# EAGLE board UV_MONITOR_V2_1 (EAGLE 8.4.0)
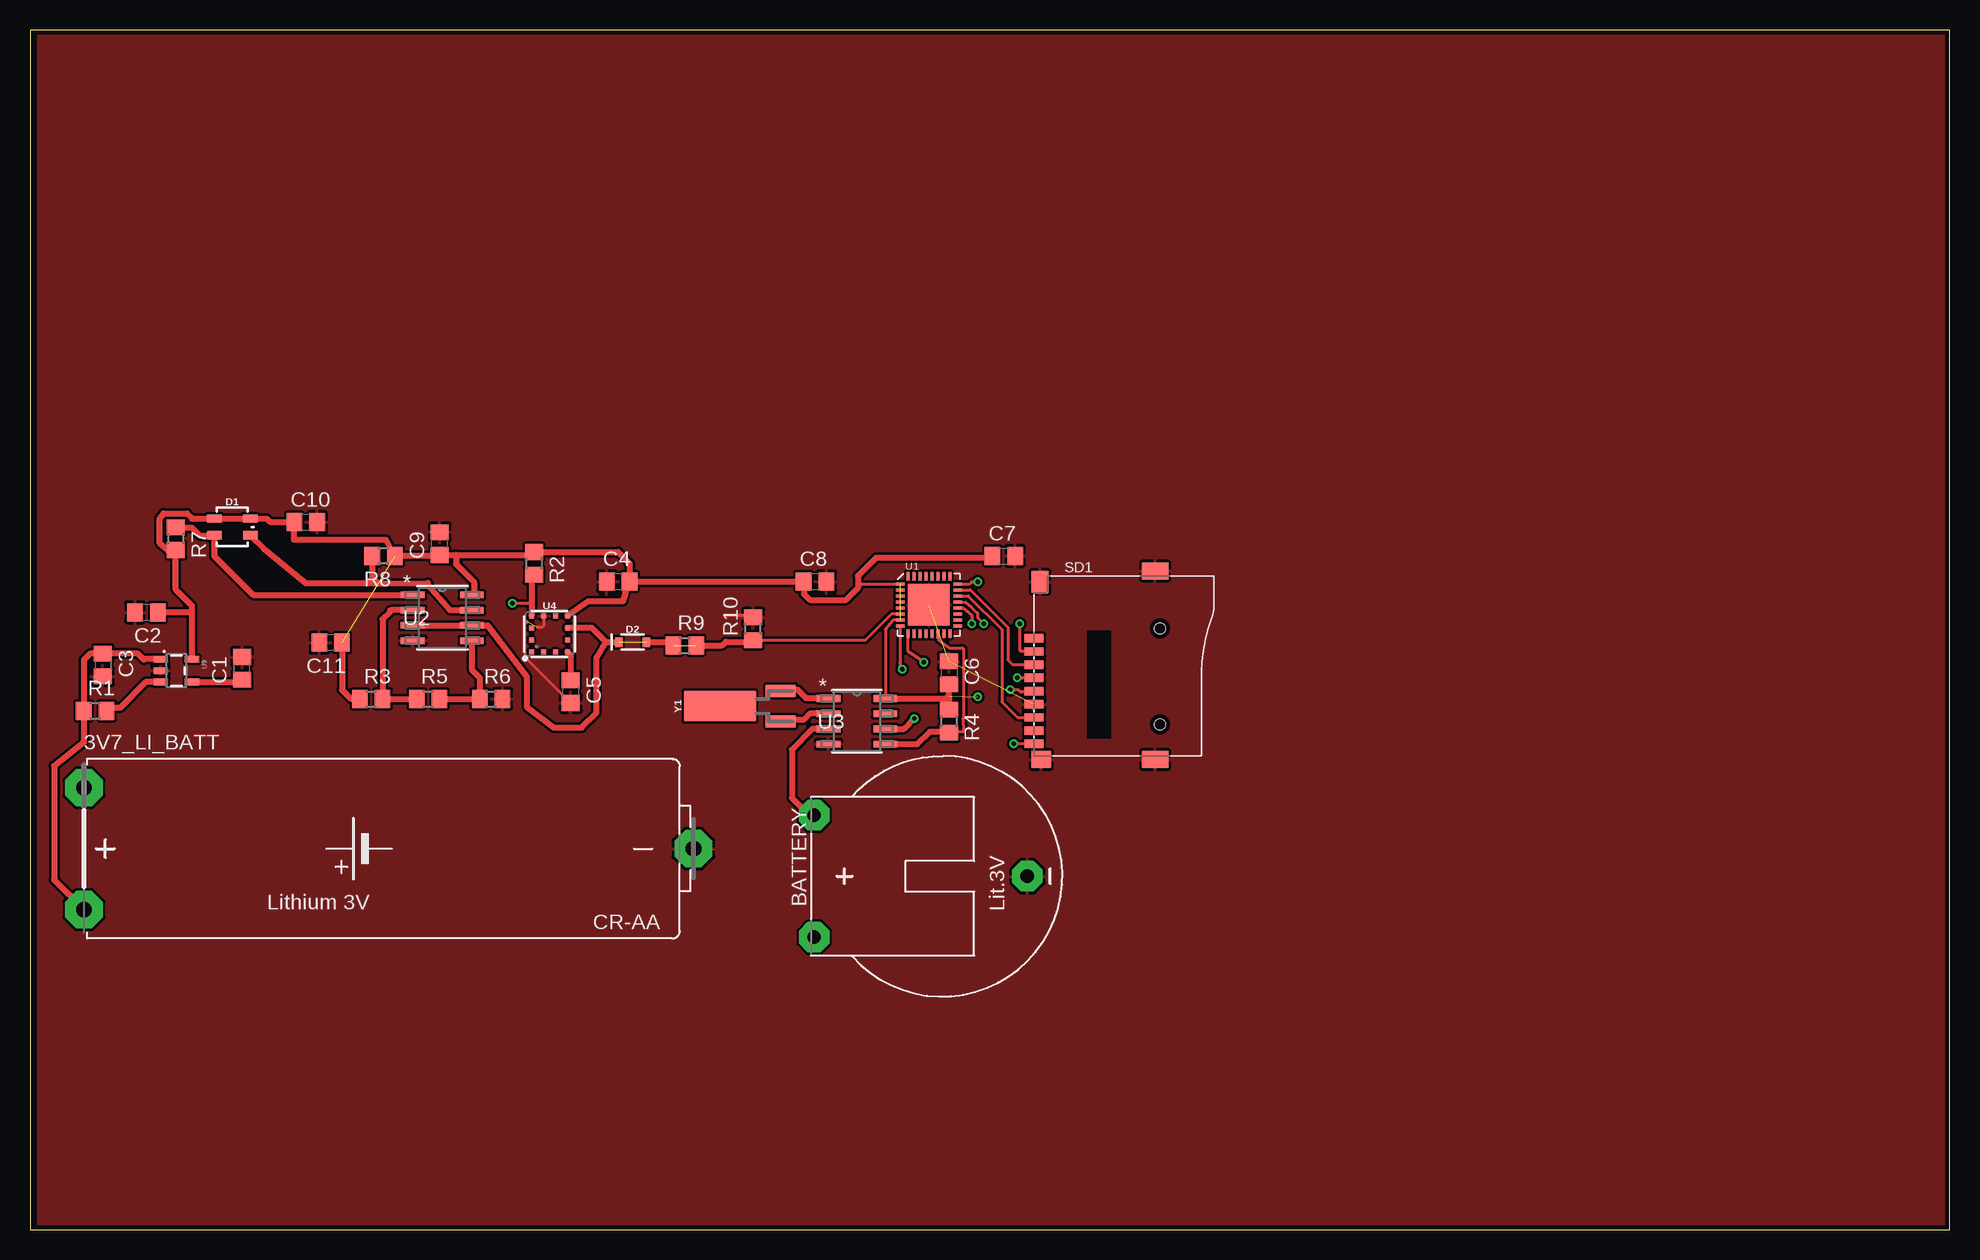
[diagram p0: board, top side]
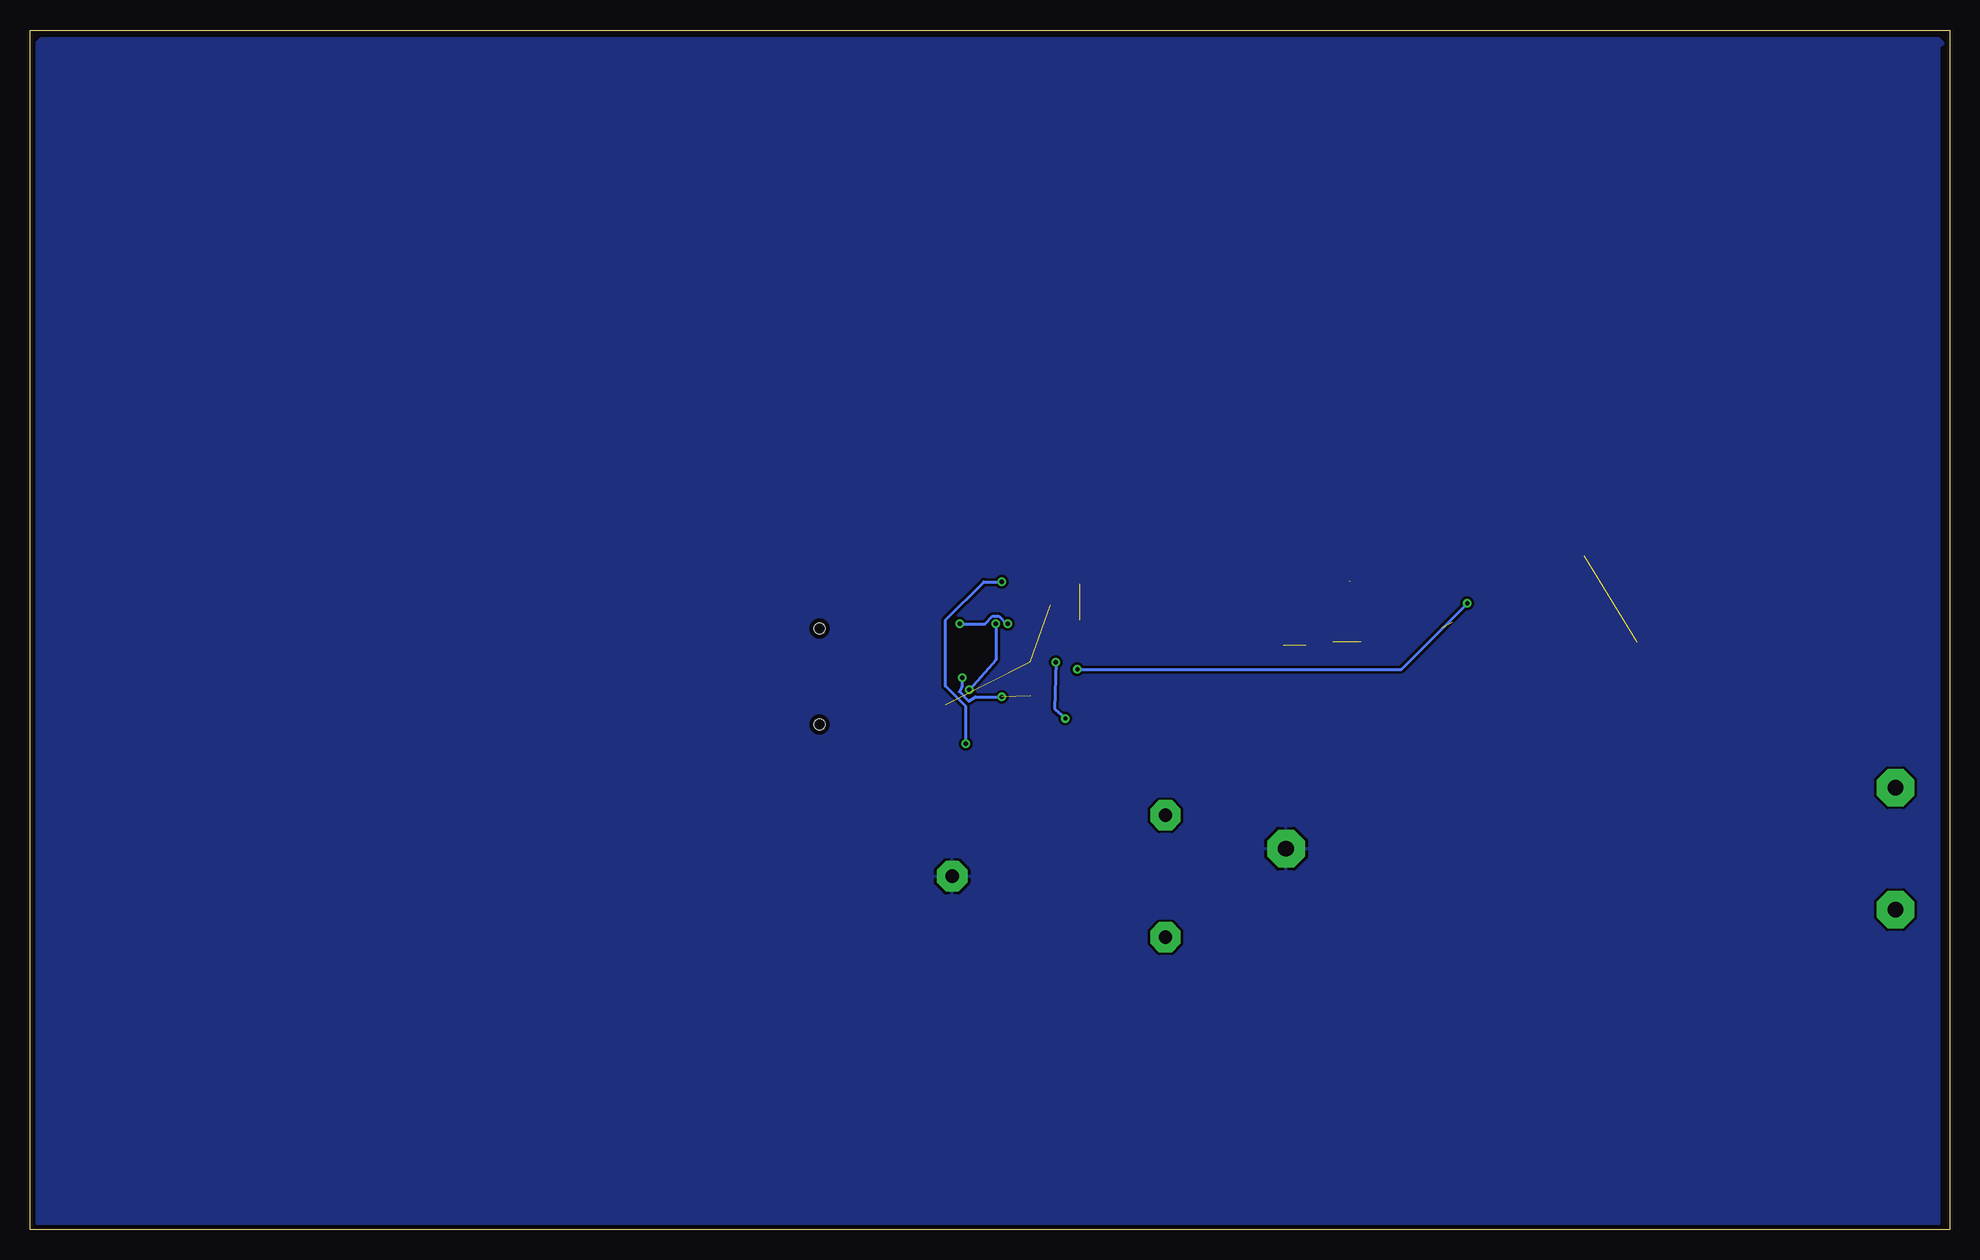
[diagram p1: board, bottom side, seen from below]

Size 160 x 100 mm. Coordinates in mm from the lower left corner, seen from the top.
Outline: 0,0 160,0 160,100 0,100 0,0
Copper layers (1*16): Top 0.0356mm / dielectric 1.5011mm / Bottom 0.0356mm
Design rules "osh-park-2-layers-design-rules": minimum track width 6mil, minimum drill 10mil, track to track 6mil, track to pad 6mil, pad to pad 6mil, via to via 6mil, smd to smd 6mil, copper to edge 15mil, drill to drill 6mil, minimum pad ring 7mil, minimum via ring 7mil, stop-mask expansion 3mil, vias tented up to drill 0mil, thermal gap 10mil
Net classes: 0 default: clearance 0.205 mm

## Footprints (pad centres in the part's own frame; a part is rotated, then mirrored left to right if it is on the bottom)
CRAA = drill 1.321 pad 3.15 octagon: + -25.4,-5.08; +@1 -25.4,5.08; - 25.4,0
CR2032H = drill 1.118 pad 2.54 octagon: + 5.08,10.795; +@1 -5.08,10.795; - 0,-6.985
C0805 = smd 1.3 x 1.5: 1 -0.95,0; 2 0.95,0
LED-TRICOLOR-SMD = smd 1.2 x 0.7: A 1.5,0.7; B -1.5,0.7; G -1.5,-0.7; R 1.5,-0.7
SOD-323 = smd 0.63 x 0.83: A 1.15,0; C -1.15,0
R0805 = smd 1.3 x 1.5: 1 -0.95,0; 2 0.95,0
MICRO-SD9+4P-SMD-16.1X14.5X1.85MM = smd 1.6 x 0.7: 1 0,2.25; 2 0,1.15; 3 0,0.05; 4 0,-1.05; 5 0,-2.15; 6 0,-3.25; 7 0,-4.35; 8 0,-5.45; 9 0,-6.55 | smd 1.6 x 1.4: G1 0.6,-7.85 | smd 2.2 x 1.4: G2 10.1,-7.85; G3 10.1,7.85 | smd 1.4 x 1.8: G4 0.5,6.95 | hole 0.9: 10.5,-4.95; 10.5,3.05
ESP8266EX = smd 0.7 x 0.25: CHIP_EN -2.4,-1.25; GPOIO5 2.4,1.75; LNA -2.4,1.25; SD_CLK 2.4,0.25; SD_CMD 2.4,-0.25; SD_DATA_0 2.4,0.75; SD_DATA_1 2.4,1.25; SD_DATA_2 2.4,-1.25; SD_DATA_3 2.4,-0.75; TOUT -2.4,-0.75; VDD3P3 -2.4,0.75; VDD3P3$2 -2.4,0.25; VDD_RTC -2.4,-0.25; VDDA -2.4,1.75; VDDPST$2 2.4,-1.75; XPD_DCDC -2.4,-1.75 | smd 0.25 x 0.7: EXT_RSTB -1.75,2.4; GPIO0 1.25,-2.4; GPIO2 0.75,-2.4; GPIO4 1.75,-2.4; MTCK -0.25,-2.4; MTDI -1.25,-2.4; MTDO 0.25,-2.4; MTMS -1.75,-2.4; RES12K -1.25,2.4; U0RXD 1.75,2.4; U0TXD 1.25,2.4; VDDA$2 -0.75,2.4; VDDD -0.25,2.4; VDDPST -0.75,-2.4; XTAL_IN 0.25,2.4; XTAL_OUT 0.75,2.4 | smd 3.45 x 3.45: GND 0,0
M08A = smd 1.981 x 0.559: 1 -2.464,1.905; 2 -2.464,0.635; 3 -2.464,-0.635; 4 -2.464,-1.905; 5 2.464,-1.905; 6 2.464,-0.635; 7 2.464,0.635; 8 2.464,1.905
SOIC8-N_MC = smd 1.981 x 0.559: 1 -2.362,1.905; 2 -2.362,0.635; 3 -2.362,-0.635; 4 -2.362,-1.905; 5 2.362,-1.905; 6 2.362,-0.635; 7 2.362,0.635; 8 2.362,1.905
ML8511 = smd 0.4 x 0.4: 1 -1.5,-1.5; 2 -1.5,-0.5; 3 -1.5,0.5; 4 -1.5,1.5; 5 -0.5,1.5; 6 0.5,1.5; 7 1.5,1.5; 8 1.5,0.5; 9 1.5,-0.5; 10 1.5,-1.5; 11 0.5,-1.5; 12 -0.5,-1.5
SOT23-5 = smd 0.55 x 1.2: 1 -0.95,-1.3; 2 0,-1.3; 3 0.95,-1.3; 4 0.95,1.3; 5 -0.95,1.3
CRYSTAL-SMD-2X6-CYL = smd 2.5 x 6: SHEILD 0,5.08 | smd 1 x 2.5: X1 -1.27,0; X2 1.27,0

## Placement (x,y rotation side)
3V7_LI_BATT  CR-AA  [CRAA]  29.9,31.75 0 top
BATTERY  CR2032H  [CR2032H]  76.15,29.45 90 top
C1  470p  [C0805]  17.67,46.78 90 top
C2  2.2n  [C0805]  9.7,51.45 180 top
C3  2.2n  [C0805]  6.08,47.06 270 top
C4  0.1u  [C0805]  49.03,54.03 0 top
C5  1n  [C0805]  45.07,44.85 270 top
C6  2.2n  [C0805]  76.59,46.41 270 top
C7  2.2n  [C0805]  81.17,56.15 0 top
C8  2.2n  [C0805]  65.43,54.03 0 top
C9  2.2n  [C0805]  34.15,57.18 90 top
C10  2.2n  [C0805]  22.99,58.97 0 top
C11  2.2n  [C0805]  25.06,48.92 180 top
D1  RGB_LED  [LED-TRICOLOR-SMD]  16.86,58.57 0 top
D2  1V  [SOD-323]  50.23,48.96 0 top
R1  10k  [R0805]  5.43,43.25 0 top
R2  10k  [R0805]  42,55.53 270 top
R3  80k  [R0805]  28.44,44.23 0 top
R4  2k  [R0805]  76.59,42.37 270 top
R5  100k  [R0805]  33.19,44.23 0 top
R6  150k  [R0805]  38.44,44.23 0 top
R7  3k  [R0805]  12.15,57.6 270 top
R8  3k  [R0805]  29.47,56.15 180 top
R9  10k  [R0805]  54.58,48.69 0 top
R10  10k  [R0805]  60.28,50.08 90 top
SD1  ST-TF-003A  [MICRO-SD9+4P-SMD-16.1X14.5X1.85MM]  83.69,47.04 0 top
U1  ESP8266EX  [ESP8266EX]  74.93,52.07 0 top
U2  LM2903M  [M08A]  34.37,51 0 top
U3  MCP7940N-I/SN  [SOIC8-N_MC]  68.93,42.37 0 top
U4  ML8511 UV_SENSOR  [ML8511]  43.3,49.65 0 top
U9  MIC5219 3.3V  [SOT23-5]  12.2,46.6 270 top
Y1  32.768kHz  [CRYSTAL-SMD-2X6-CYL]  62.58,43.64 90 top

## Library data of the parts
3V7_LI_BATT BATTERY = battery
C1-C11 R1-R10 = rcl
D1 = SparkFun-LED; PROD_ID: DIO-08324
D2 = SparkFun-DiscreteSemi; PROD_ID: DIO-08199
SD1 = Seeed-Connector; MPN: ST-TF-003A
U1 = ESP8266EX
U2 = LM2903M; MANUFACTURER_PART_NUMBER: LM2903M; VENDOR: Texas Instruments
U3 = MCP7940N; MANUFACTURER_PART_NUMBER: MCP7940NISN; VENDOR: MICROCHIP
U4 = SparkFun-Sensors; PROD_ID: IC-11927
U9 = SparkFun-IC-Power; PROD_ID: VREG-09872
Y1 = SparkFun-Clocks; PROD_ID: XTAL-07894

## Nets
+3V3: C2.1 C4.2 C6.2 C7.1 C8.1 C9.1 C10.1 C11.1 D1.A D1.B R2.1 R3.1 R4.1 R7.2 R8.1 SD1.4 U1.CHIP_EN U1.VDDA U2.8 U3.8 U4.7 U9.5
BP: C1.1 U9.4
CARD_DET: SD1.9 U1.GPOIO5
EN: R1.2 U9.3
GND: 3V7_LI_BATT.- BATTERY.- C1.2 C2.2 C3.2 C4.1 C5.2 C6.1 C7.2 C8.2 C9.2 C10.2 C11.2 R6.2 R10.2 SD1.6 SD1.G1 SD1.G2 SD1.G3 SD1.G4 U1.GND U2.4 U3.4 U4.5 U9.2
GREEN_LED: D1.G R7.1 U2.1
H_REF: R3.2 R5.1 U2.2
L_REF: R5.2 R6.1 U2.5
MAIN_BAT: 3V7_LI_BATT.+ C3.1 R1.1 U9.1
N$2: U3.2 Y1.X1
N$6: U3.1 Y1.X2
RED_LED: D1.R R8.2 U2.7
RTC_SCL: U1.MTMS U3.6
RTC_SDA: R4.2 U1.GPIO2 U3.5
SD_CLK: SD1.5 U1.SD_CLK
SD_CS: SD1.2 U1.SD_CMD
SD_MISO: SD1.7 U1.SD_DATA_0
SD_MOSI: SD1.3 U1.SD_DATA_1
TR: C5.1 U4.10
UV_ADC: D2.A D2.C R9.1 R9.2 R10.1 U1.TOUT U2.3 U2.6 U4.8
UV_SEN_EN: R2.2 U1.XPD_DCDC U4.4
VBAT: BATTERY.+ U3.3

## Tracks (layer width: path | path; a pad name or v marks a point on that pad's centre or on a via)
+3V3  (via drill 0.35)  (4 unrouted)
  Top 0.254: U1.CHIP_EN 72,50.82 71.29,50.02 U3.8 | 69,53.5 69.32,53.82 U1.VDDA | SD1.4 v82.3,46
  Top 0.508: 76.59,44.5 R4.1 | 76.59,44.5 C6.2 | U3.8 76.36,44.27 76.59,44.5 | U9.5 13.5,51.5 | 13.5,51.5 | 13.5,51.5 13.5,52 12.15,53.35 R7.2 11.51,56.59 10.83,57.19 10.79,57.73 10.79,59.27 11.13,59.71 13.07,59.71 13.51,59.27 D1.B D1.A 19.73,59.27 20,59 22.01,59 C10.1 22,58.93 22,57.5 29.64,57.5 29.68,57.47 29.68,57.49 R8.1 34.07,56.15 C9.1 35.5,56.23 | C2.1 10.7,51.5 13.5,51.5 | 35.5,56.23 41.95,56.23 R2.1 49.02,56.48 50,55.5 50,54.05 50.02,54.03 C8.1 64.5,54.01 64.5,53 65,52.5 68,52.5 69,53.5 69,54.5 70.5,56 80.07,56 C7.1 | 35.5,56.23 35.5,55.5 37,54 37,53.07 U2.8 | C11.1 26.01,44.99 26.77,44.23 R3.1 | C4.2 49.64,53.19 49.64,53.11 49.4,52.37 46.52,52.37 U4.7
  Bottom 0.254: v82.3,46 82.3,45.29 82.33,45.26 82.53,44.84 81.76,44.07 81.74,44.07 81.21,44.4 v79,44.4
BP
  Top 0.508: U9.4 17.49,45.65 arc90 C1.1
CARD_DET  (via drill 0.35)
  Top 0.254: U1.GPOIO5 78.32,53.82 78.5,54 v79,54 | SD1.9 v82,40.5
  Bottom 0.254: v82,40.5 82,43.6 83.7,45.3 83.7,50.8 80.5,54 v79,54
EN
  Top 0.508: U9.3 9.65,45.65 7.5,43.5 6.63,43.5 R1.2
GND  (3 unrouted)
  Top 0.254: R10.2 60.11,51.2 58,51.2 | 41.43,50.65 41.27,50.49 41.27,47.7 C5.2 | U4.5 42.8,50.3 42.7,50.2 42.33,50.2
  pour Bottom: 0.9,98.6 0.9,0.4 1,0.3 159.2,0.3 159.4,0.5 159.4,99 159.1,99.3 0.9,99.3 0.5,98.9
  pour Top: 0.7,99.5 0.7,0.2 0.5,0 159.1,0 159.8,0.7 159.8,99.4 159.6,99.6 0.5,99.6
GREEN_LED
  Top 0.508: R7.1 12.2,58.5 13.5,58.5 14.13,57.87 D1.G 15.36,56.14 17.99,53.51 18,53.51 18.6,52.91 U2.1
H_REF
  Top 0.508: R5.1 R3.2 29.39,50.89 30,51.5 arc-90 30.14,51.63 U2.2
L_REF
  Top 0.508: R5.2 R6.1 37.5,46 36.83,46.67 U2.5
MAIN_BAT
  Top 0.508: U9.1 9.55,47.55 9.5,47.5 8.99,48.01 C3.1 5.01,48.01 4.48,47.48 R1.1 4.48,40.61 2.02,38.65 2.02,29.15 3V7_LI_BATT.+
N$2
  Top 0.2: 62.71,42.5 Y1.X1
  Top 0.508: U3.2 65,43.01 64.5,42.5 62.71,42.5
N$6
  Top 0.2: 62.67,45 Y1.X2
  Top 0.508: U3.1 64.72,44.27 64,45 62.67,45
RED_LED
  Top 0.508: D1.R 19.5,56.73 23,53.87 29,53.87 | 29,53.87 29.82,53.87 33.15,53.91 33.16,53.79 35.02,51.63 U2.7 | 28.37,56 R8.2 28.52,54.34 29,53.87
RTC_SCL  (via drill 0.35)
  Top 0.254: U1.MTMS 73.2,49.65 73.2,48.2 v74.5,47.3
  Top 0.508: U3.6 72.83,41.73 v73.7,42.6
  Bottom 0.254: v74.5,47.3 74.6,43.4 v73.7,42.6
RTC_SDA
  Top 0.254: 75.08,41.42 75,41.5 | U1.GPIO2 75.68,49.3 75.74,49.14 75.96,48.94 76.6,48.5 77.7,48.5 77.82,48.42 77.82,42.65 77.76,42.59 77.8,41.49 76.51,41.5
  Top 0.508: U3.5 73.97,40.47 75,41.5 76.51,41.5 R4.2
SD_CLK  (via drill 0.35)
  Top 0.254: SD1.5 83.6,44.8 82.6,44.8 82.4,45 v81.7,45 | U1.SD_CLK 77.97,52.28 78.24,52.08 78.21,52.09 78.23,52.08 78.45,51.88 78.81,51.51 78.94,51.4 78.95,51.38 78.96,51.37 78.98,51.02 v79.5,50.5
  Bottom 0.254: v79.5,50.5 79.5,47.5 v81.7,45
SD_CS  (via drill 0.35)
  Top 0.254: U1.SD_CMD 77.76,51.82 78.5,51.18 v78.5,50.5 | SD1.2 82.6,48.2 82.5,48.3 v82.5,50.5
  Bottom 0.254: v82.5,50.5 80.39,50.5 79.76,51.13 79.24,51.13 78.61,50.5 v78.5,50.5
SD_MISO
  Top 0.254: U1.SD_DATA_0 78.2,52.82 81,50.02 81,44 82.31,42.69 SD1.7
SD_MOSI
  Top 0.254: U1.SD_DATA_1 78.38,53.32 81.5,50.2 81.5,47.5 81.91,47.09 SD1.3
TR
  Top 0.508: U4.10 45.07,47.88 C5.1
UV_ADC  (2 unrouted)
  Top 0.254: R10.1 69.63,49.13 71.82,51.32 U1.TOUT
  Top 0.508: D2.A 53.36,48.96 R9.1 | R9.2 57.69,48.69 58,49 60.15,49 R10.1 | U2.3 U2.6 38.13,50.37 41.41,46.09 41.41,43.58 43.65,41.84 45.99,41.84 47.23,43.08 47.23,47.65 48.04,48.96 | U4.8 46.85,50.15 48.04,48.96 | 48.04,48.96 D2.C
UV_SEN_EN  (via drill 0.35)
  Top 0.254: 41.8,52.2 v40.2,52.2 | U1.XPD_DCDC 72.53,47.23 72.5,47.2 72.5,46.9 v72.7,46.7
  Top 0.508: R2.2 41.8,54.38 41.8,52.2 U4.4
  Bottom 0.254: v72.7,46.7 45.7,46.7 v40.2,52.2
VBAT
  Top 0.508: U3.3 65.23,41.73 63.5,40 63.5,36 64.97,34.53 BATTERY.+